# EAGLE board stm v0.6 (EAGLE 9.5.0), part 1 of 2
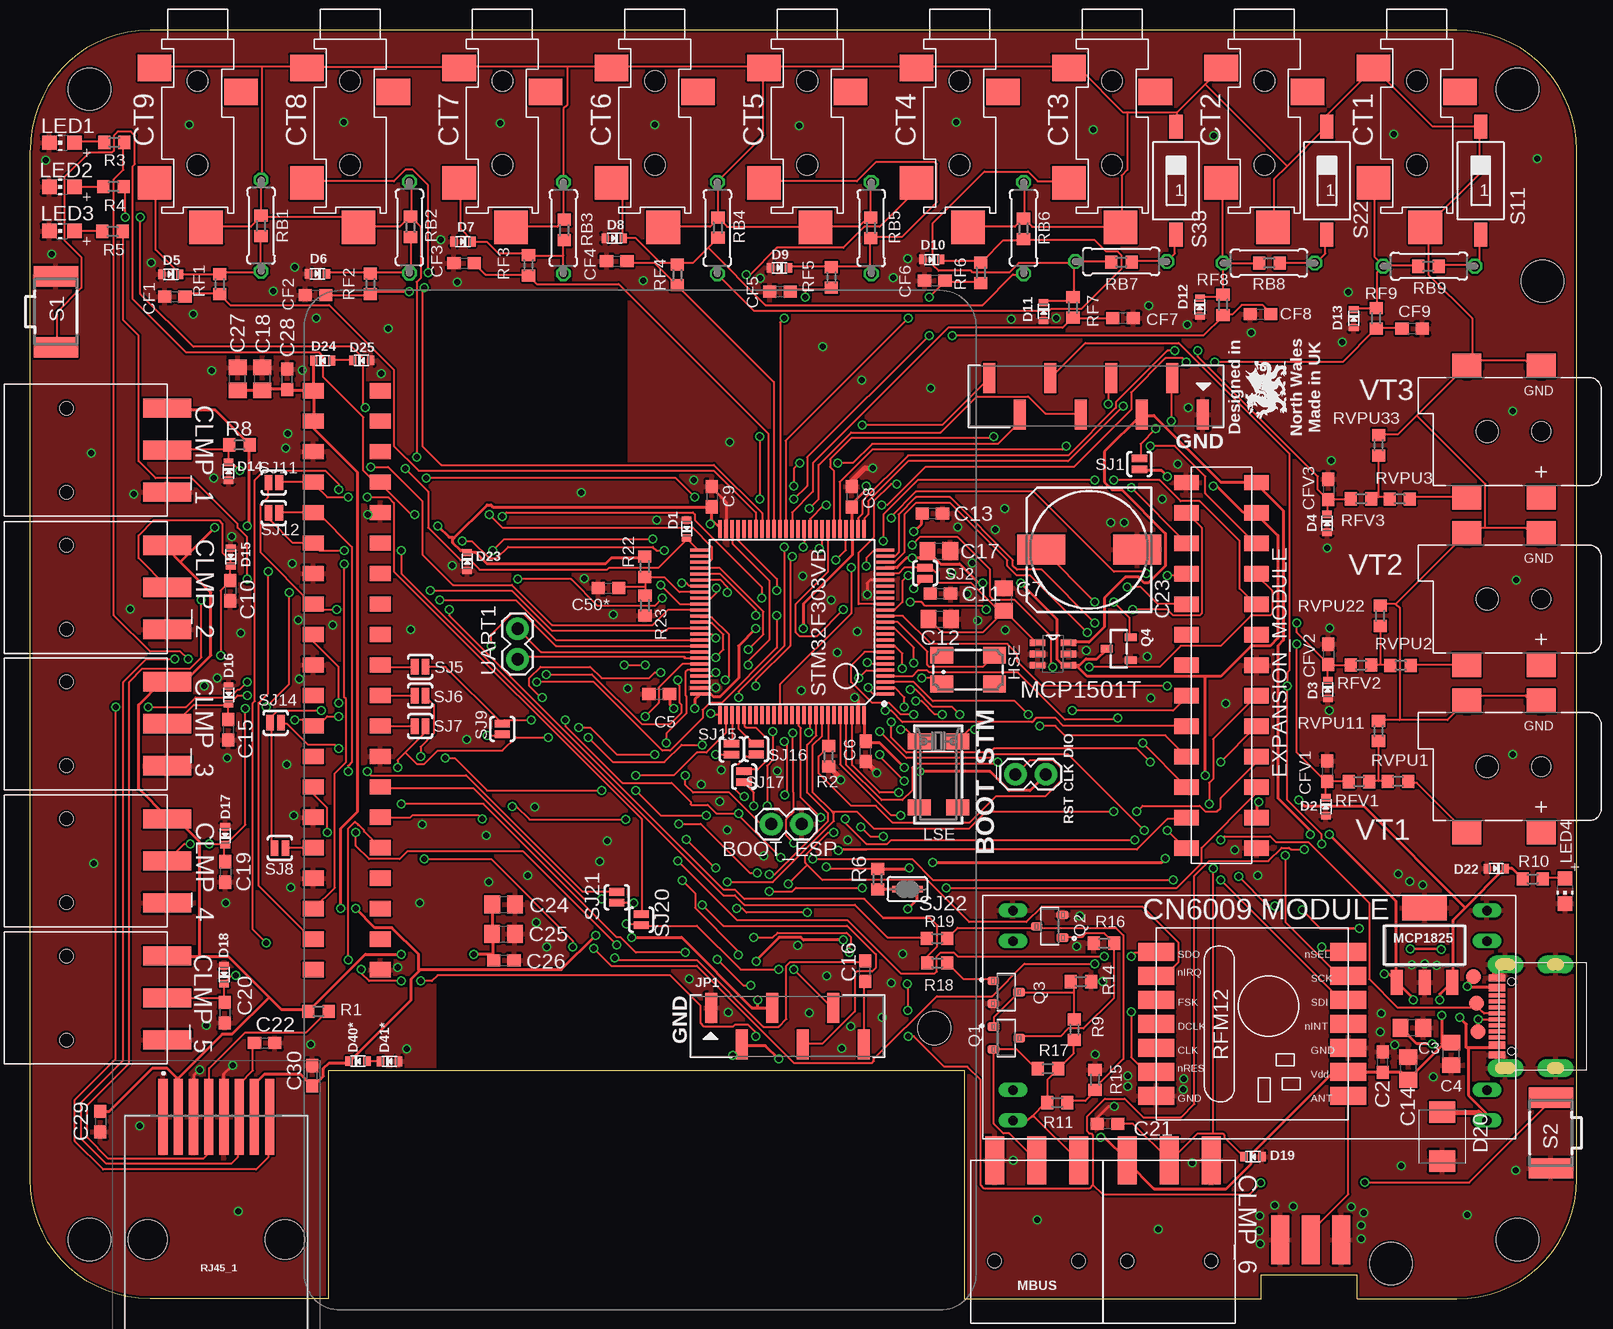
[diagram p0: board, top side]
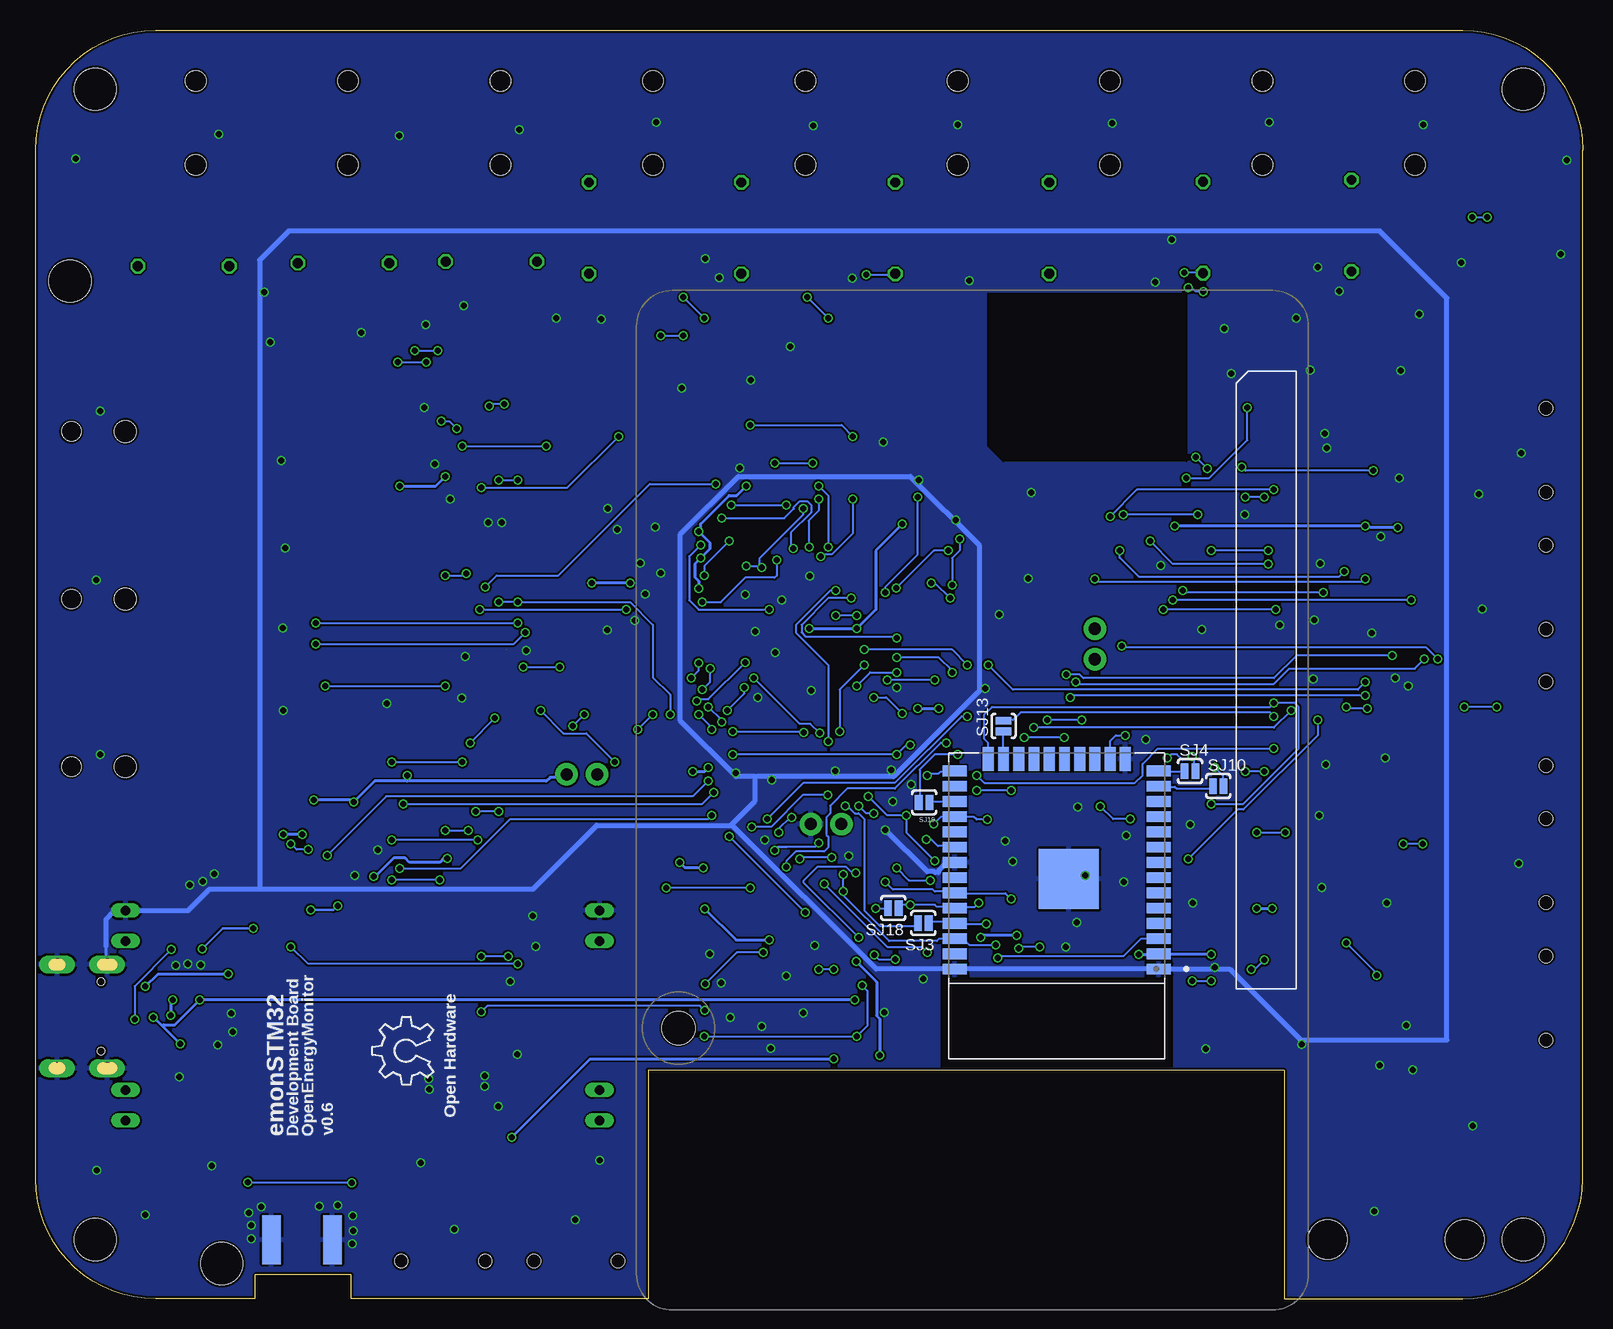
[diagram p1: board, bottom side, seen from below]

Size 128.91 x 105.79 mm. Coordinates in mm from the lower left corner, seen from the top.
Outline: 128.91,10 128.91,95.79 arc90 118.91,105.79 10,105.79 arc90 0,95.79 0,10 arc90 10,0 24.86,0 24.86,19.07 77.87,19.07 77.87,0 102.6,0 102.6,2 110.6,2 110.6,0 118.91,0 arc90 128.91,10
Copper layers (1*16): Top 0.035mm / dielectric 1.53mm / Bottom 0.035mm
Design rules "ragworm": minimum track width 7mil, minimum drill 0.5mm, track to track 6mil, track to pad 6mil, pad to pad 7mil, via to via 8mil, smd to smd 0mil, copper to edge 8mil, drill to drill 10mil, minimum pad ring 3mil, minimum via ring 3mil, stop-mask expansion 2mil, vias tented up to drill 25mil, thermal gap 8mil
Net classes: 0 default: width 0.178 mm, drill 0.5 mm, clearance 0.152 mm; 1 power: width 0.254 mm, drill 0.5 mm, clearance 0.152 mm; 2 gnd: width 0.203 mm, drill 0.5 mm, clearance 0.152 mm
Holes 3.5 mm at 123.95,100.85 4.95,100.85 4.95,4.95 123.95,4.95 126.04,84.85 113.41,2.95
tRestrict: area 34,18.4 to 53.3,26.8; area 33,69.8 to 49.5,83.8
bRestrict: area 34.2,18.4 to 53.5,26.8; area 33,69.8 to 49.5,83.8

## Footprints (pad centres in the part's own frame; a part is rotated, then mirrored left to right if it is on the bottom)
OMNIMATE_LSF_3_SMT = smd 1.6 x 4: P$1 0,4.2; P$2 3.5,4.2; P$3 7,4.2 | hole 1.1: 0,-4.2; 7,-4.2
1X02 = drill 1.016 pad 1.88: 1 0,0; 2 2.54,0
C0603 = smd 1.1 x 1: 1 -0.85,0; 2 0.85,0
C0805 = smd 1.3 x 1.5: 1 -0.95,0; 2 0.95,0
153CLV-1010 = smd 4 x 2.5: + 4,0; - -4,0
STEREO_SMT = smd 2.8 x 2.2: P$1 -3.6,-2.4; P$3 3.6,-4.4 | smd 2.8 x 2.8: P$2 -3.6,-12; P$4 0.7,-15.7 | hole 1.7: 0,-3.5; 0,-10.5
SOD-523 = smd 0.8 x 0.6: A 0,-0.75; K 0,0.75
SMBJ = smd 1.78 x 2.16: A 2.04,0; C -2.03,0
2X13_SMT = smd 1.27 x 2.032: 1 -15.24,-2.921; 2 -15.24,2.921; 3 -12.7,-2.921; 4 -12.7,2.921; 5 -10.16,-2.921; 6 -10.16,2.921; 7 -7.62,-2.921; 8 -7.62,2.921; 9 -5.08,-2.921; 10 -5.08,2.921; 11 -2.54,-2.921; 12 -2.54,2.921; 13 0,-2.921; 14 0,2.921; 15 2.54,-2.921; 16 2.54,2.921; 17 5.08,-2.921; 18 5.08,2.921; 19 7.62,-2.921; 20 7.62,2.921; 21 10.16,-2.921; 22 10.16,2.921; 23 12.7,-2.921; 24 12.7,2.921; 25 15.24,-2.921; 26 15.24,2.921
CTS406 = smd 1.9 x 1.4: 1 -2.2,-1.2; 2 2.2,-1.2; 3 2.2,1.2; 4 -2.2,1.2
SMA-EDGE = smd 1.524 x 4.064: GND@0 0,0; GND@1 5.08,0; SIG 2.54,0 | smd 1.524 x 4.064 bottom: GND@2 0,0; GND@3 5.08,0
1X06_SMT = smd 1 x 2.5: 1 -6.35,1.52; 2 -3.81,-1.52; 3 -1.27,1.52; 4 1.27,-1.52; 5 3.81,1.52; 6 6.35,-1.52
1X08_SMT = smd 1 x 2.5: 1 -8.89,1.52; 2 -6.35,-1.52; 3 -3.81,1.52; 4 -1.27,-1.52; 5 1.27,1.52; 6 3.81,-1.52; 7 6.35,1.52; 8 8.89,-1.52
CHIP-LED0805 = smd 1.2 x 1.2: A 0,-1.05; C 0,1.05
CRYSTAL_8X3.8 = smd 1.3 x 1.9: P$1 -2.75,-1.6; P$2 2.75,-1.6; P$3 2.75,1.6; P$4 -2.75,1.6
SOT-223 = smd 1 x 2.1: 1 -2.3,-3.1; 2 0,-3.1; 3 2.3,-3.1 | smd 3.7 x 2.1: 4 0,3.1
RPI3MIRROR2 = smd 1.27 x 1.778: P$41 8.371,6.351; P$42 8.371,0.763; P$43 10.911,6.351; P$44 10.911,0.763; P$45 13.451,6.351; P$46 13.451,0.763; P$47 15.991,6.351; P$48 15.991,0.763; P$49 18.531,6.351; P$50 18.531,0.763; P$51 21.071,6.351; P$52 21.071,0.763; P$53 23.611,6.351; P$54 23.611,0.763; P$55 26.151,6.351; P$56 26.151,0.763; P$57 28.691,6.351; P$58 28.691,0.763; P$59 31.231,6.351; P$60 31.231,0.763; P$61 33.771,6.351; P$62 33.771,0.763; P$63 36.311,6.351; P$64 36.311,0.763; P$65 38.851,6.351; P$66 38.851,0.763; P$67 41.391,6.351; P$68 41.391,0.763; P$69 43.931,6.351; P$70 43.931,0.763; P$71 46.471,6.351; P$72 46.471,0.763; P$73 49.011,6.351; P$74 49.011,0.763; P$75 51.551,6.351; P$76 51.551,0.763; P$77 54.091,6.351; P$78 54.091,0.763; P$79 56.631,6.351; P$80 56.631,0.763 | hole 2.75: 61.5,52.505
SOT23 = smd 0.71 x 0.96: 1 -0.95,-1.075; 2 0.95,-1.075; 3 0,1.075
SOT23-R = smd 0.635 x 1.016: 1 -0.95,-1; 2 0.95,-1; 3 0,1
R0603 = smd 1 x 1.1: 1 -0.85,0; 2 0.85,0
0207/7 = drill 0.813 octagon: 1 -3.81,0; 2 3.81,0
RFM12 = smd 1.5 x 3: 1 -5,-10; 2 -3,-10; 3 -1,-10; 4 1,-10; 5 3,-10; 6 5,-10; 7 7,-10; 8 7,6; 9 5,6; 10 3,6; 11 1,6; 12 -1,6; 13 -3,6; 14 -5,6
955016889 = smd 0.76 x 6.35: 1 -4.445,8.975; 2 -3.175,8.975; 3 -1.905,8.975; 4 -0.635,8.975; 5 0.635,8.975; 6 1.905,8.975; 7 3.175,8.975; 8 4.445,8.975 | hole 3.25: -5.715,-1.25; 5.715,-1.25
KSS = smd 1.7 x 3.7: 1 -2.95,0; 2 2.95,0
SMS-001 = smd 1.092 x 2.007: 1 0,-4.496; 2 0,4.496
SJ_2S-NO = smd 0.635 x 1.27: 1 -0.45,0; 2 0.45,0
SJ-CON = smd 1.016 x 0.508: 1 -0.762,0; 2 0.762,0
TQFP100 = smd 0.27 x 1.5: 1 -6,-7.75; 2 -5.5,-7.75; 3 -5,-7.75; 4 -4.5,-7.75; 5 -4,-7.75; 6 -3.5,-7.75; 7 -3,-7.75; 8 -2.5,-7.75; 9 -2,-7.75; 10 -1.5,-7.75; 11 -1,-7.75; 12 -0.5,-7.75; 13 0,-7.75; 14 0.5,-7.75; 15 1,-7.75; 16 1.5,-7.75; 17 2,-7.75; 18 2.5,-7.75; 19 3,-7.75; 20 3.5,-7.75; 21 4,-7.75; 22 4.5,-7.75; 23 5,-7.75; 24 5.5,-7.75; 25 6,-7.75; 51 6,7.75; 52 5.5,7.75; 53 5,7.75; 54 4.5,7.75; 55 4,7.75; 56 3.5,7.75; 57 3,7.75; 58 2.5,7.75; 59 2,7.75; 60 1.5,7.75; 61 1,7.75; 62 0.5,7.75; 63 0,7.75; 64 -0.5,7.75; 65 -1,7.75; 66 -1.5,7.75; 67 -2,7.75; 68 -2.5,7.75; 69 -3,7.75; 70 -3.5,7.75; 71 -4,7.75; 72 -4.5,7.75; 73 -5,7.75; 74 -5.5,7.75; 75 -6,7.75 | smd 1.5 x 0.27: 26 7.75,-6; 27 7.75,-5.5; 28 7.75,-5; 29 7.75,-4.5; 30 7.75,-4; 31 7.75,-3.5; 32 7.75,-3; 33 7.75,-2.5; 34 7.75,-2; 35 7.75,-1.5; 36 7.75,-1; 37 7.75,-0.5; 38 7.75,0; 39 7.75,0.5; 40 7.75,1; 41 7.75,1.5; 42 7.75,2; 43 7.75,2.5; 44 7.75,3; 45 7.75,3.5; 46 7.75,4; 47 7.75,4.5; 48 7.75,5; 49 7.75,5.5; 50 7.75,6; 76 -7.75,6; 77 -7.75,5.5; 78 -7.75,5; 79 -7.75,4.5; 80 -7.75,4; 81 -7.75,3.5; 82 -7.75,3; 83 -7.75,2.5; 84 -7.75,2; 85 -7.75,1.5; 86 -7.75,1; 87 -7.75,0.5; 88 -7.75,0; 89 -7.75,-0.5; 90 -7.75,-1; 91 -7.75,-1.5; 92 -7.75,-2; 93 -7.75,-2.5; 94 -7.75,-3; 95 -7.75,-3.5; 96 -7.75,-4; 97 -7.75,-4.5; 98 -7.75,-5; 99 -7.75,-5.5; 100 -7.75,-6
B1,27 = smd 1.27 x 1.27: TP 0,0
MODULE_ESP32-WROOM-32D = smd 2 x 0.9: 1 -8.5,5.26; 2 -8.5,3.99; 3 -8.5,2.72; 4 -8.5,1.45; 5 -8.5,0.18; 6 -8.5,-1.09; 7 -8.5,-2.36; 8 -8.5,-3.63; 9 -8.5,-4.9; 10 -8.5,-6.17; 11 -8.5,-7.44; 12 -8.5,-8.71; 13 -8.5,-9.98; 14 -8.5,-11.25; 25 8.5,-11.25; 26 8.5,-9.98; 27 8.5,-8.71; 28 8.5,-7.44; 29 8.5,-6.17; 30 8.5,-4.9; 31 8.5,-3.63; 32 8.5,-2.36; 33 8.5,-1.09; 34 8.5,0.18; 35 8.5,1.45; 36 8.5,2.72; 37 8.5,3.99; 38 8.5,5.26 | smd 0.9 x 2: 15 -5.715,-12.25; 16 -4.445,-12.25; 17 -3.175,-12.25; 18 -1.905,-12.25; 19 -0.635,-12.25; 20 0.635,-12.25; 21 1.905,-12.25; 22 3.175,-12.25; 23 4.445,-12.25; 24 5.715,-12.25 | smd 5 x 5: 39 -1,-2.24
BOOST = drill 0.8 long: IN+ 17.5,39.5; IN+1 14.96,39.5; OUT+ 17.5,0; OUT+1 14.96,0; P$1 0,0; P$2 0,39.5; P$3 2.54,39.5; P$4 2.54,0
USB-C = smd 0.6 x 1.4: A1/B12 -3.2,0.7; A4/B9 -2.4,0.7; B1/A12 3.2,0.7; B4/A9 2.4,0.7 | smd 0.3 x 1.4: A5 -1.25,0.7; A6 -0.25,0.7; A7 0.25,0.7; A8 1.25,0.7; B5 1.75,0.7; B6 0.75,0.7; B7 -0.75,0.7; B8 -1.75,0.7 | drill 1 pad 1.2 long: GND1 -4.32,0; GND2 4.33,0; GND3 4.33,-4.18; GND4 -4.32,-4.18 | hole 0.6: -2.89,-0.5; 2.89,-0.5
SOT95P280X145-6N = smd 1.27 x 0.559: 1 -1.295,0.94; 2 -1.295,0; 3 -1.295,-0.94; 4 1.295,-0.94; 5 1.295,0; 6 1.295,0.94
DCJACK_2MM_SMT = smd 2.4 x 2: GND 0,-5.5; GNDBREAK 6.2,-5.5; PWR1 0,5.5; PWR2 6.2,5.5 | hole 1.6: 0,0 | hole 1.8: 4.5,0

## Placement (x,y rotation side)
3POLE_1  OMNIMATE_LSF_3COMBICON_SMT_3  [OMNIMATE_LSF_3_SMT]  7.23,74.26 270 top
3POLE_2  OMNIMATE_LSF_3COMBICON_SMT_3  [OMNIMATE_LSF_3_SMT]  7.23,62.83 270 top
3POLE_3  OMNIMATE_LSF_3COMBICON_SMT_3  [OMNIMATE_LSF_3_SMT]  7.23,51.46 270 top
3POLE_4  OMNIMATE_LSF_3COMBICON_SMT_3  [OMNIMATE_LSF_3_SMT]  7.23,40.03 270 top
3POLE_5  OMNIMATE_LSF_3COMBICON_SMT_3  [OMNIMATE_LSF_3_SMT]  7.23,28.6 270 top
3POLE_6  OMNIMATE_LSF_3COMBICON_SMT_3  [OMNIMATE_LSF_3_SMT]  91.44,7.37 0 top
3POLE_7  OMNIMATE_LSF_3COMBICON_SMT_3  [OMNIMATE_LSF_3_SMT]  80.39,7.37 0 top
BOOT_ESP  [1X02]  64.31,39.6 180 top
BOOT_STM  [1X02]  82.12,43.74 0 top
C2  100nF  [C0603]  112.73,19.75 90 top
C3  4.7uF  [C0805]  115.16,22.6 180 top
C4  4.7uF  [C0805]  118.45,20.44 90 top
C5  100nF  [C0603]  52.44,50.42 0 top
C6  100nF  [C0603]  69.63,45.66 90 top
C7  1uF  [C0805]  81.16,58.31 90 top
C8  100nF  [C0603]  68.49,66.87 270 top
C9  100nF  [C0603]  56.82,66.88 270 top
C10  100nF  [C0603]  16.7,59.06 270 top
C11  10nF  [C0603]  75.86,58.81 0 top
C12  1uF  [C0805]  75.81,56.68 0 top
C13  10nF  [C0603]  75.19,65.49 0 top
C14  1uF  [C0805]  114.87,19.22 90 top
C15  100nF  [C0603]  16.53,47.45 270 top
C16  100nF  [C0603]  69.6,27.34 90 top
C17  1uF  [C0805]  75.74,62.36 0 top
C18  4.7uF  [C0805]  19.37,76.71 90 top
C19  100nF  [C0603]  16.29,35.6 270 top
C20  100nF  [C0603]  16.22,23.88 270 top
C21  100nF  [C0603]  89.79,14.61 180 top
C22  100nF  [C0603]  19.56,21.34 0 top
C23  [153CLV-1010]  88.25,62.46 180 top
C24  4.7uF  [C0805]  39.47,32.88 0 top
C25  4.7uF  [C0805]  39.46,30.43 0 top
C26  100nF  [C0603]  39.49,28.25 0 top
C27  4.7uF  [C0805]  17.29,76.7 90 top
C28  100nF  [C0603]  21.45,76.66 90 top
C29  100nF  [C0603]  5.87,14.79 270 top
C30  100nF  [C0603]  23.52,18.62 90 top
C50*  1uF  [C0603]  48.21,59.25 0 top
CF1  100nF  [C0603]  12.07,83.56 0 top
CF2  100nF  [C0603]  23.79,83.69 0 top
CF3  100nF  [C0603]  36.18,86.34 0 top
CF4  100nF  [C0603]  48.9,86.51 0 top
CF5  100nF  [C0603]  62.49,83.99 0 top
CF6  100nF  [C0603]  75.4,84.9 0 top
CF7  100nF  [C0603]  91.09,81.75 180 top
CF8  100nF  [C0603]  102.54,82.1 0 top
CF9  100nF  [C0603]  115.18,80.88 180 top
CFV1  100nF  [C0603]  108.1,44 270 top
CFV2  100nF  [C0603]  108.2,53.74 270 top
CFV3  100nF  [C0603]  108.2,67.49 270 top
CT1  STEREO_SMD  [STEREO_SMT]  115.57,105.04 0 top
CT2  STEREO_SMD  [STEREO_SMT]  102.87,105.04 0 top
CT3  STEREO_SMD  [STEREO_SMT]  90.17,105.04 0 top
CT4  STEREO_SMD  [STEREO_SMT]  77.47,105.04 0 top
CT5  STEREO_SMD  [STEREO_SMT]  64.77,105.04 0 top
CT6  STEREO_SMD  [STEREO_SMT]  52.07,105.04 0 top
CT7  STEREO_SMD  [STEREO_SMT]  39.37,105.04 0 top
CT8  STEREO_SMD  [STEREO_SMT]  26.67,105.04 0 top
CT9  STEREO_SMD  [STEREO_SMT]  13.97,105.04 0 top
D1  ESD5Z3.3T1G  [SOD-523]  54.72,64.19 180 top
D2  ESD5Z3.3T1G  [SOD-523]  107.99,41.04 0 top
D3  ESD5Z3.3T1G  [SOD-523]  108.16,50.81 0 top
D4  ESD5Z3.3T1G  [SOD-523]  108.09,64.67 0 top
D5  ESD5Z3.3T1G  [SOD-523]  11.73,85.42 270 top
D6  ESD5Z3.3T1G  [SOD-523]  23.95,85.46 270 top
D7  ESD5Z3.3T1G  [SOD-523]  36.08,88.15 270 top
D8  ESD5Z3.3T1G  [SOD-523]  48.69,88.43 270 top
D9  ESD5Z3.3T1G  [SOD-523]  62.46,85.96 270 top
D10  ESD5Z3.3T1G  [SOD-523]  75.14,86.65 270 top
D11  ESD5Z3.3T1G  [SOD-523]  84.46,82.32 0 top
D12  ESD5Z3.3T1G  [SOD-523]  97.49,82.7 0 top
D13  ESD5Z3.3T1G  [SOD-523]  110.31,81.74 0 top
D14  ESD5Z3.3T1G  [SOD-523]  16.54,69 0 top
D15  ESD5Z3.3T1G  [SOD-523]  16.73,61.86 180 top
D16  ESD5Z3.3T1G  [SOD-523]  16.55,50.35 180 top
D17  ESD5Z3.3T1G  [SOD-523]  16.27,38.63 180 top
D18  ESD5Z3.3T1G  [SOD-523]  16.18,27.04 180 top
D19  ESD5Z3.3T1G  [SOD-523]  101.91,11.87 90 top
D20  [SMBJ]  117.67,13.55 270 top
D22  ESD5Z3.3T1G  [SOD-523]  122.19,35.88 270 top
D23  ESD5Z3.3T1G  [SOD-523]  36.43,61.49 0 top
D24  ESD5Z3.3T1G  [SOD-523]  24.39,78.23 90 top
D25  ESD5Z3.3T1G  [SOD-523]  27.63,78.24 90 top
D40*  ESD5Z3.3T1G  [SOD-523]  27.34,19.82 90 top
D41*  ESD5Z3.3T1G  [SOD-523]  29.96,19.81 90 top
EXPANSION_MODULE  TSM-113-01-T-DV  [2X13_SMT]  99.29,52.83 270 top
HSE  8MHZ ~15pFmax  [CTS406]  78.18,52.47 0 top
J$1  SMA_EDGE  [SMA-EDGE]  104.18,4.93 0 top
JP1  [1X06_SMT]  63.12,22.73 0 top
JP3  [1X08_SMT]  88.84,75.25 180 top
LED1  Green 1.85V  [CHIP-LED0805]  2.67,96.39 90 top
LED2  Orange 1.85V  [CHIP-LED0805]  2.67,92.71 90 top
LED3  Red 1.85V  [CHIP-LED0805]  2.67,89.03 90 top
LED4  Green 1.85V  [CHIP-LED0805]  127.92,34.02 180 top
LOGO1  OSHW_LOGO_6MILX0200-NT  [OSHW_6X200_NOTEXT]  95.78,17.86 90 bottom
LSE  32.768kHz  [CRYSTAL_8X3.8]  75.7,43.73 270 top
MCP1825  MCP1825SOT-223-3  [SOT-223]  116.21,29.5 0 top
PCB2  RPI3YA  [RPI3MIRROR2]  22.84,84.09 270 top
Q1  MMBT3906  [SOT23]  81.37,21.75 270 top
Q2  MMBT3904  [SOT23]  84.97,31.07 90 top
Q3  MMBT3904  [SOT23]  81.34,25.58 270 top
Q4  [SOT23-R]  90.74,54.21 90 top
R1  4.7k  [R0603]  24.04,23.98 180 top
R2  10k  [R0603]  66.56,45.24 270 top
R3  220R  [R0603]  7.02,96.42 0 top
R4  220R  [R0603]  6.96,92.74 0 top
R5  220R  [R0603]  6.89,89 0 top
R6  1.5K  [R0603]  70.64,35 90 top
R8  4.7k  [R0603]  17.46,71.2 0 top
R9  39K  [R0603]  87.03,22.46 270 top
R10  220R  [R0603]  125.23,35.02 180 top
R11  33K  [R0603]  85.61,16.38 180 top
R14  22K  [R0603]  87.57,26.46 180 top
R15  3k3  [R0603]  88.75,18.27 270 top
R16  82R  [R0603]  89.51,29.66 0 top
R17  220K  [R0603]  84.82,19.2 0 top
R18  1K  [R0603]  75.6,28.01 180 top
R19  1K  [R0603]  75.6,30.06 180 top
R22  10k  [R0603]  51.23,61.05 90 top
R23  10k  [R0603]  51.24,57.81 90 top
RB1  22r  [R0603]  19.25,89.46 90 top
RB2  22r  [R0603]  31.71,89.37 90 top
RB3  22r  [R0603]  44.52,89.12 90 top
RB4  22r  [R0603]  57.33,89.31 90 top
RB5  22r  [R0603]  70.07,89.29 90 top
RB6  22r  [R0603]  82.78,89.22 90 top
RB7  22r  [R0603]  90.95,86.43 0 top
RB8  22r  [R0603]  103.28,86.36 0 top
RB9  22r  [R0603]  116.53,86.08 0 top
RB10  22r  [0207/7]  19.26,89.48 90 top
RB11  22r  [0207/7]  31.62,89.33 90 top
RB12  22r  [0207/7]  44.45,89.28 90 top
RB13  22r  [0207/7]  57.28,89.28 90 top
RB14  22r  [0207/7]  70.1,89.28 90 top
RB15  22r  [0207/7]  82.8,89.28 90 top
RB16  22r  [0207/7]  90.93,86.49 0 top
RB17  22r  [0207/7]  103.25,86.36 0 top
RB18  22r  [0207/7]  116.59,86.11 0 top
RF1  330R  [R0603]  15.81,84.6 270 top
RF2  330R  [R0603]  28.36,84.62 270 top
RF3  330R  [R0603]  41.54,86.18 270 top
RF4  330R  [R0603]  53.94,85.36 270 top
RF5  330R  [R0603]  66.78,85.16 270 top
RF6  330R  [R0603]  79.24,85.55 270 top
RF7  330R  [R0603]  86.91,82.65 270 top
RF8  330R  [R0603]  99.42,82.89 270 top
RF9  330R  [R0603]  112.18,81.76 270 top
RFM69HCW  RFM12_SMDSMD  [RFM12]  103.86,23.92 270 top
RFV1  330R  [R0603]  110.75,43.13 180 top
RFV2  330R  [R0603]  110.93,52.85 180 top
RFV3  330R  [R0603]  110.92,66.72 180 top
RJ45_1  95501-6889  [955016889]  15.53,6.22 0 top
RVPU1  120k  [R0603]  114,43.15 0 top
RVPU2  120k  [R0603]  114.22,52.82 0 top
RVPU3  120k  [R0603]  114.15,66.7 180 top
RVPU11  10k  [R0603]  112.38,47.36 90 top
RVPU22  10k  [R0603]  112.52,56.96 90 top
RVPU33  10k  [R0603]  112.39,71.18 90 top
S1  KSS221GLFS  [KSS]  2.16,82.3 270 top
S2  KSS221GLFS  [KSS]  126.75,13.84 90 top
S11  SWS001  [SMS-001]  120.9,93.22 0 top
S22  SWS001  [SMS-001]  108.08,93.22 0 top
S33  SWS001  [SMS-001]  95.5,93.22 0 top
SJ1  SOLDERJUMPERNO  [SJ_2S-NO]  92.46,69.62 270 top
SJ2  SOLDERJUMPERNO  [SJ_2S-NO]  74.59,60.5 90 top
SJ3  SOLDERJUMPERNO  [SJ_2S-NO]  54.94,31.33 180 bottom
SJ4  SOLDERJUMPERNO  [SJ_2S-NO]  32.71,44.01 0 bottom
SJ5  SOLDERJUMPERNO  [SJ_2S-NO]  32.51,52.7 180 top
SJ6  SOLDERJUMPERNO  [SJ_2S-NO]  32.51,50.29 180 top
SJ7  SOLDERJUMPERNO  [SJ_2S-NO]  32.51,47.75 180 top
SJ8  SOLDERJUMPERNO  [SJ_2S-NO]  20.83,37.59 180 top
SJ9  SOLDERJUMPERNO  [SJ_2S-NO]  39.36,47.52 90 top
SJ10  SOLDERJUMPERNO  [SJ_2S-NO]  30.36,42.76 0 bottom
SJ11  SOLDERJUMPERNO  [SJ_2S-NO]  20.32,68.07 180 top
SJ12  SOLDERJUMPERNO  [SJ_2S-NO]  20.32,65.53 180 top
SJ13  SOLDERJUMPERNO  [SJ_2S-NO]  48.25,47.76 90 bottom
SJ14  SOLDERJUMPERNO  [SJ_2S-NO]  20.46,48.03 0 top
SJ15  SOLDERJUMPERNO  [SJ_2S-NO]  58.46,45.83 270 top
SJ16  SOLDERJUMPERNO  [SJ_2S-NO]  60.52,45.85 270 top
SJ17  SOLDERJUMPERNO  [SJ_2S-NO]  59.51,43.54 270 top
SJ18  SOLDERJUMPERNO  [SJ_2S-NO]  57.44,32.59 180 bottom
SJ19  SOLDERJUMPERNO  [SJ_2S-NO]  54.86,41.4 180 bottom
SJ20  SOLDERJUMPERNO  [SJ_2S-NO]  50.93,31.62 270 top
SJ21  SOLDERJUMPERNO  [SJ_2S-NO]  48.9,33.49 270 top
SJ22  [SJ-CON]  73.11,34.16 180 top
STM32F303VB  STM32F303XB  [TQFP100]  63.5,56.44 90 top
TP4  TPB1,27  [B1,27]  120.28,26.89 0 top
TP5  TPB1,27  [B1,27]  120.66,22.27 0 top
TP6  TPB1,27  [B1,27]  120.53,24.66 0 top
U1  ESP32-WROOM-32D  [MODULE_ESP32-WROOM-32D]  43.81,32.77 180 bottom
U$2  BOOST_MODULE  [BOOST]  81.92,32.38 270 top
UART1  [1X02]  40.64,53.34 90 top
USB-C  CSP-USC16-TR  [USB-C]  122.95,23.56 90 top
VREF_3V3  MCP1501T-33E  [SOT95P280X145-6N]  85.25,53.78 0 top
VT1  2.1MMJACKSMT  [DCJACK_2MM_SMT]  125.94,44.38 180 top
VT2  2.1MMJACKSMT  [DCJACK_2MM_SMT]  125.94,58.35 180 top
VT3  2.1MMJACKSMT  [DCJACK_2MM_SMT]  125.94,72.32 180 top

## Library data of the parts
3POLE_1-3POLE_6 = OMNIMATE_LSF; MPN: 1824530
3POLE_7 = OMNIMATE_LSF
BOOT_ESP BOOT_STM SJ1-SJ21 UART1 = SparkFun
C2 C5 C6 C8-C10 C15 C16 C19-C22 C26 C28-C30 CF1-CF9 CFV1-CFV3 R1 R2 R8 R22 R23 RB1-RB9 RF1-RF9 RFV1-RFV3 RVPU1-RVPU3 RVPU11 RVPU22 RVPU33 = resistor
C3 C4 C7 C11-C14 C17 C18 C23-C25 C27 C50* = rcl; SPICEPREFIX: C
CT1 = IotaWatt_parts; MPN: SJ-3523-SMT
CT2-CT9 = IotaWatt_parts
D1-D19 D22-D25 D40* D41* LSE Q4 = microbuilder
D20 = diode
EXPANSION_MODULE = pinhead+; MANUFACTURER: SAMTEC; MPN: TSM-113-01-T-DV
HSE = crystal; OC_FARNELL: unknown; OC_NEWARK: unknown
J$1 = SparkFun-Connectors
JP1 JP3 = pinhead+
LED1-LED4 VT1-VT3 = adafruit
LOGO1 = ohw-logo
MCP1825 = SteelCaveRobotics-Power
PCB2 = e14_Rpi3_RevA+mirror-pcb copy
Q1 = Transistor; CREATED_BY: PCB Layout; DIGIKEY_PART_NUMBER: MMBT3906FSCT-ND; MANUFACTURER: ON Semiconductor; MPN: MMBT3906; PACKAGE: SOT-23
Q2 Q3 = Transistor; CREATED_BY: PCB Layout; DIGIKEY_PART_NUMBER: MMBT3904FSCT-ND; MANUFACTURER: ON Semiconductor; MPN: MMBT3904; PACKAGE: SOT-23-3
R3-R6 R9-R11 R14-R19 RB10-RB18 = rcl; SPICEPREFIX: R
RFM69HCW = rfm12b _ rfm69cw
RJ45_1 = 95501-6889 rj45 smt; ALLIED_NUMBER: 70372913; ALLIED_PRICE-STOCK: https://www.alliedelec.com/molex-incorporated-95501-6889/70372913/; DESCRIPTION: Molex Cat3 8-Way Female RJ45 Connector Right Angle Surface Mount Unshielded; HEIGHT: 11.5mm; MANUFACTURER_NAME: Molex; MANUFACTURER_PART_NUMBER: 95501-6889; MOUSER_PART_NUMBER: 538-95501-6889; MOUSER_PRICE-STOCK: https://www.mouser.com/Search/Refine.aspx?Keyword=538-95501-6889; RS_PART_NUMBER: 3862738; RS_PRICE-STOCK: http://uk.rs-online.com/web/p/products/3862738
S1 S2 = KSS221GLFS; DESCRIPTION: IP40 Side Tactile Switch, SPST-NO 50 mA; HEIGHT: mm; MANUFACTURER_NAME: C & K COMPONENTS; MANUFACTURER_PART_NUMBER: KSS221GLFS; RS_PART_NUMBER: 7931689P; RS_PRICE-STOCK: http://uk.rs-online.com/web/p/products/7931689P
S11 S22 S33 = smd-special
SJ22 = jumper-con_db
STM32F303VB = stm32f303
TP4-TP6 = testpad
U1 = ESP32-WROOM-32D; AVAILABILITY: Unavailable; DESCRIPTION: IC: SoC; GPIO, I2C, I2S, IR, SD, SDIO, SPI, UART; 2.7÷3.6VDC; 20dBm; MF: Espressif Systems; MP: ESP32-WROOM-32D; PACKAGE: Module Espressif Systems; PRICE: None
U$2 = BOOST MODULE CN6009
USB-C = CSP-USC16-TR; MPN: CSP-USC16-TR
VREF_3V3 = MCP1501T-33E

## Nets
24V: 3POLE_7.P$3 R9.2 R11.2 R17.2 U$2.OUT+
+3V3 [power]: 3POLE_1.P$1 3POLE_2.P$1 3POLE_3.P$1 3POLE_4.P$1 3POLE_5.P$1 3POLE_6.P$1 BOOT_STM.2 C2.1 C4.2 C5.2 C6.2 C8.2 C9.2 C13.1 C14.1 C17.1 C24.1 C25.1 C26.1 C29.1 D22.K D23.K EXPANSION_MODULE.4 EXPANSION_MODULE.24 JP1.2 MCP1825.3 Q4.3 R1.2 R8.2 R10.2 R22.2 RFM69HCW.9 RJ45_1.2 SJ1.2 SJ2.1 SJ22.1 STM32F303VB.22 STM32F303VB.28 STM32F303VB.50 STM32F303VB.75 STM32F303VB.100 U1.2 VREF_3V3.4
+3V3_ADC: C7.1 C11.1 C12.1 SJ2.2 STM32F303VB.21 VREF_3V3.1
+5V [power]: C3.2 C18.1 C27.1 C28.1 C30.1 D20.C D24.K D40*.K EXPANSION_MODULE.2 JP1.3 JP3.3 MCP1825.1 PCB2.P$42 PCB2.P$44 RJ45_1.7 TP4.TP U$2.IN+ USB-C.A4/B9 USB-C.B4/A9 VREF_3V3.6
AC1: RVPU1.2 VT1.PWR2
AC2: RVPU2.2 VT2.PWR2
AC3: RVPU3.1 VT3.PWR2
ADC0: RFV3.1 RVPU3.2 RVPU33.1
ADC_RJ45IN: RJ45_1.8 STM32F303VB.54
BIAS: CT1.P$1 CT1.P$4 CT2.P$1 CT2.P$4 CT3.P$1 CT3.P$4 CT4.P$1 CT4.P$4 CT5.P$1 CT5.P$4 CT6.P$1 CT6.P$4 CT7.P$1 CT7.P$4 CT8.P$1 CT8.P$4 CT9.P$1 CT9.P$4 D1.K RB1.2 RB2.2 RB3.2 RB4.2 RB5.2 RB6.2 RB10.2 RB11.2 RB12.2 RB13.2 RB14.2 RB15.2 RVPU11.2 RVPU22.2 RVPU33.2 S11.2 S22.2 S33.2 STM32F303VB.51 VT1.GND VT1.GNDBREAK VT2.GND VT2.GNDBREAK VT3.GND VT3.GNDBREAK
BIAS_IN: C50*.2 R22.1 R23.2 STM32F303VB.58
BOOT0: BOOT_STM.1 R2.1 STM32F303VB.94
BUTTON1: PCB2.P$47 S1.2 STM32F303VB.53
CS_RFM69: PCB2.P$64 RFM69HCW.14 SJ13.2
CS_STM32: SJ8.2 SJ14.1 SJ19.2
CSESP_STM32: SJ19.1 U1.27
CT1: CF1.2 RF1.2 STM32F303VB.44
CT1_EX: EXPANSION_MODULE.3 STM32F303VB.29
CT2: CF2.2 RF2.2 STM32F303VB.43
CT2_EX: EXPANSION_MODULE.6 STM32F303VB.30
CT3: CF3.2 RF3.2 STM32F303VB.42
CT3_EX: EXPANSION_MODULE.5 STM32F303VB.31
CT4: CF4.2 RF4.2 STM32F303VB.41
CT4_EX: EXPANSION_MODULE.8 STM32F303VB.32
CT5: CF5.2 RF5.2 STM32F303VB.40
CT5_EX: EXPANSION_MODULE.7 STM32F303VB.33
CT6: CF6.2 RF6.2 STM32F303VB.39
CT6_EX: EXPANSION_MODULE.10 STM32F303VB.15
CT7: CF7.2 RF7.2 STM32F303VB.38
CT7_EX: EXPANSION_MODULE.9 STM32F303VB.16
CT8: CF8.2 RF8.2 STM32F303VB.36
CT9: CF9.2 RF9.2 STM32F303VB.35
D+: R6.2 STM32F303VB.71 TP5.TP USB-C.A6
D-: STM32F303VB.70 TP6.TP USB-C.A7
DIO0: PCB2.P$58 RFM69HCW.2 STM32F303VB.89 U1.24
DS18B20_2: 3POLE_1.P$2 D14.K R8.1 STM32F303VB.61
DS18B20_RJ45: R1.1 RJ45_1.4 STM32F303VB.66
GND [power]: 3POLE_1.P$3 3POLE_2.P$3 3POLE_3.P$3 3POLE_4.P$3 3POLE_5.P$3 3POLE_6.P$3 3POLE_7.P$1 BOOT_ESP.1 C2.2 C3.1 C4.1 C5.1 C6.1 C7.2 C8.1 C9.1 C10.2 C11.2 C12.2 C13.2 C14.2 C15.2 C17.2 C18.2 C19.2 C20.2 C21.2 C22.2 C23.- C24.2 C25.2 C26.2 C27.2 C28.2 C29.2 C30.2 C50*.1 CF1.1 CF2.1 CF3.1 CF4.1 CF5.1 CF6.1 CF7.1 CF8.1 CF9.1 CFV1.1 CFV2.1 CFV3.1 D1.A D2.A D3.A D4.A D5.A D6.A D7.A D8.A D9.A D10.A D11.A D12.A D13.A D14.A D15.A D16.A D17.A D18.A D19.A D20.A D22.A D23.A D25.A D41*.A EXPANSION_MODULE.1 EXPANSION_MODULE.14 EXPANSION_MODULE.26 J$1.GND@0 J$1.GND@1 J$1.GND@2 J$1.GND@3 JP1.1 JP3.1 LED1.C LED2.C LED3.C LED4.C MCP1825.2 MCP1825.4 PCB2.P$46 PCB2.P$49 PCB2.P$54 PCB2.P$60 PCB2.P$65 PCB2.P$70 PCB2.P$74 PCB2.P$79 Q2.2 Q3.2 Q4.1 R2.2 R14.1 R15.1 R16.1 R23.1 RFM69HCW.7 RFM69HCW.10 RJ45_1.1 RJ45_1.3 RJ45_1.5 S1.1 S2.1 STM32F303VB.20 STM32F303VB.49 STM32F303VB.74 STM32F303VB.99 U1.1 U1.15 U1.31 U1.38 U1.39 U$2.P$1 U$2.P$2 USB-C.A1/B12 USB-C.B1/A12 USB-C.GND1 USB-C.GND2 USB-C.GND3 USB-C.GND4 VREF_3V3.2 VREF_3V3.3 VREF_3V3.5
HSE_IN: HSE.1 STM32F303VB.12
HSE_OUT: HSE.3 STM32F303VB.13
HSPI_CLK: SJ10.1 U1.13
HSPICS0: SJ13.1 U1.23
HSPID: SJ9.1 U1.16
HSPIQ: SJ4.1 U1.14
IO1_EX: EXPANSION_MODULE.15 STM32F303VB.97
IO2_EX: EXPANSION_MODULE.16 STM32F303VB.98
IO3_EX: EXPANSION_MODULE.17 STM32F303VB.1
IO4_EX: EXPANSION_MODULE.18 STM32F303VB.2
IO5_EX: EXPANSION_MODULE.19 STM32F303VB.3
IO6_EX: EXPANSION_MODULE.21 STM32F303VB.4
IO7_EX: EXPANSION_MODULE.23 STM32F303VB.5
IO8_EX: EXPANSION_MODULE.25 STM32F303VB.91
IO11_EX: STM32F303VB.95
LED1_GREEN: R3.2 STM32F303VB.55
LED2_YELLOW: R4.2 STM32F303VB.56
LED3_RED: R5.2 STM32F303VB.57
MBUS_INPUT: 3POLE_7.P$2 Q1.2 R17.1
MBUS_RX: PCB2.P$56 R18.2 SJ11.2
MBUS_TX: PCB2.P$52 R19.2 SJ12.2
MISO: RFM69HCW.1 SJ4.2 SJ6.1 SJ16.2
MOSI: RFM69HCW.12 SJ5.1 SJ9.2 SJ17.2
N$1: JP3.2 SJ1.1
N$2: CT9.P$2 D5.K RB1.1 RB10.1 RF1.1
N$5: LED2.A R4.1
N$6: LED3.A R5.1
N$7: JP1.5 SJ3.1 SJ20.2 U1.35
N$8: CT8.P$2 D6.K RB2.1 RB11.1 RF2.1
N$9: LED4.A R10.1
N$10: CT7.P$2 D7.K RB3.1 RB12.1 RF3.1
N$11: JP1.4 SJ18.1 SJ21.2 U1.34
N$12: STM32F303VB.68 UART1.2
N$13: PCB2.P$66
N$14: C16.1 JP1.6
N$15: C16.2 U1.3
N$16: PCB2.P$72 SJ8.1
N$17: BOOT_ESP.2 U1.25
N$18: D24.A D25.K
N$19: D40*.A D41*.K
N$20: J$1.SIG RFM69HCW.8
N$21 [power]: R6.1 SJ22.2
N$22: PCB2.P$41
N$23: STM32F303VB.69 UART1.1
N$24: PCB2.P$57
N$26: RB9.2 RB18.2 S11.1
N$27: RB8.2 RB17.2 S22.1
N$28: RB7.2 RB16.2 S33.1
N$30: Q1.3 Q2.1 R16.2
N$31: Q1.1 Q3.3 R9.1 R14.2
N$32: Q2.3 R11.1 R15.2 R19.1
N$33: Q3.1 R18.1
N$34: RFV2.1 RVPU2.1 RVPU22.1
N$37: RFV1.1 RVPU1.1 RVPU11.1
N$38: CT6.P$2 D8.K RB4.1 RB15.1 RF4.1
N$39: CT5.P$2 D9.K RB5.1 RB14.1 RF5.1
N$40: CT4.P$2 D10.K RB6.1 RB13.1 RF6.1
N$41: LED1.A R3.1
N$42: CT3.P$2 D11.K RB7.1 RB16.1 RF7.1
N$43: CT2.P$2 D12.K RB8.1 RB17.1 RF8.1
N$44: CT1.P$2 D13.K RB9.1 RB18.1 RF9.1
NRST_STM: JP3.6 PCB2.P$71 S2.2 STM32F303VB.14 U1.30
PC14: LSE.P$1 STM32F303VB.8
PC15: LSE.P$4 STM32F303VB.9
PULSE1_RJ45: C22.1 RJ45_1.6 STM32F303VB.67
PULSE2: 3POLE_5.P$2 C20.1 D18.K STM32F303VB.65
PUSHIN_1: 3POLE_6.P$2 C21.1 D19.K STM32F303VB.96
PUSHIN_2: 3POLE_2.P$2 C10.1 D15.K STM32F303VB.62
PUSHIN_3: 3POLE_3.P$2 C15.1 D16.K STM32F303VB.63
PUSHIN_4: 3POLE_4.P$2 C19.1 D17.K STM32F303VB.64
RPI_GPIO16: PCB2.P$76 STM32F303VB.59
RPI_GPIO20: PCB2.P$78 STM32F303VB.60
RPI_MISO: PCB2.P$61 SJ6.2
RPI_MOSI: PCB2.P$59 SJ5.2
RPI_SPI_CLK: PCB2.P$63 SJ7.2
RST_RFM: PCB2.P$69 RFM69HCW.6 U1.28
SCL: EXPANSION_MODULE.22 PCB2.P$68 STM32F303VB.92 U1.36
SDA: EXPANSION_MODULE.20 PCB2.P$67 STM32F303VB.93 U1.33
SPI3_CLK: SJ15.1 STM32F303VB.78
SPI3_CS: SJ14.2 STM32F303VB.77
SPI3_CS_ESP: STM32F303VB.84
SPI3_MISO: SJ16.1 STM32F303VB.79
SPI3_MOSI: SJ17.1 STM32F303VB.80
SPI_CLK: RFM69HCW.13 SJ7.1 SJ10.2 SJ15.2
SWCLK: JP3.7 STM32F303VB.76
SWDIO: JP3.8 STM32F303VB.72
UART1_RX: PCB2.P$48 SJ11.1 SJ20.1
UART1_TX: PCB2.P$50 SJ12.1 SJ21.1
UART2_RX: JP3.4 STM32F303VB.26
UART2_TX: JP3.5 STM32F303VB.25 STM32F303VB.86
USART3_RX: SJ3.2 STM32F303VB.48
USART3_TX: SJ18.2 STM32F303VB.47
VBAT: C23.+ Q4.2 STM32F303VB.6
VSIG1: CFV1.2 D2.K RFV1.2 STM32F303VB.23
VSIG2: CFV2.2 D3.K RFV2.2 STM32F303VB.24
VSIG3: CFV3.2 D4.K RFV3.2 STM32F303VB.27
VSIG4: STM32F303VB.17
VSIG5: STM32F303VB.18
VSIG6: STM32F303VB.19
VT1_EX: EXPANSION_MODULE.11
VT2_EX: EXPANSION_MODULE.12
VT3_EX: EXPANSION_MODULE.13